# Altium PCB calculator_pcb.PcbDoc
Units mm, origin at the board's own origin, x right, y up, seen from the top; angles counter-clockwise.
Board outline 100 x 150 mm, 2 copper layers (Top Layer, Bottom Layer); 21 components, 9 nets, 157 pads, 24 vias.
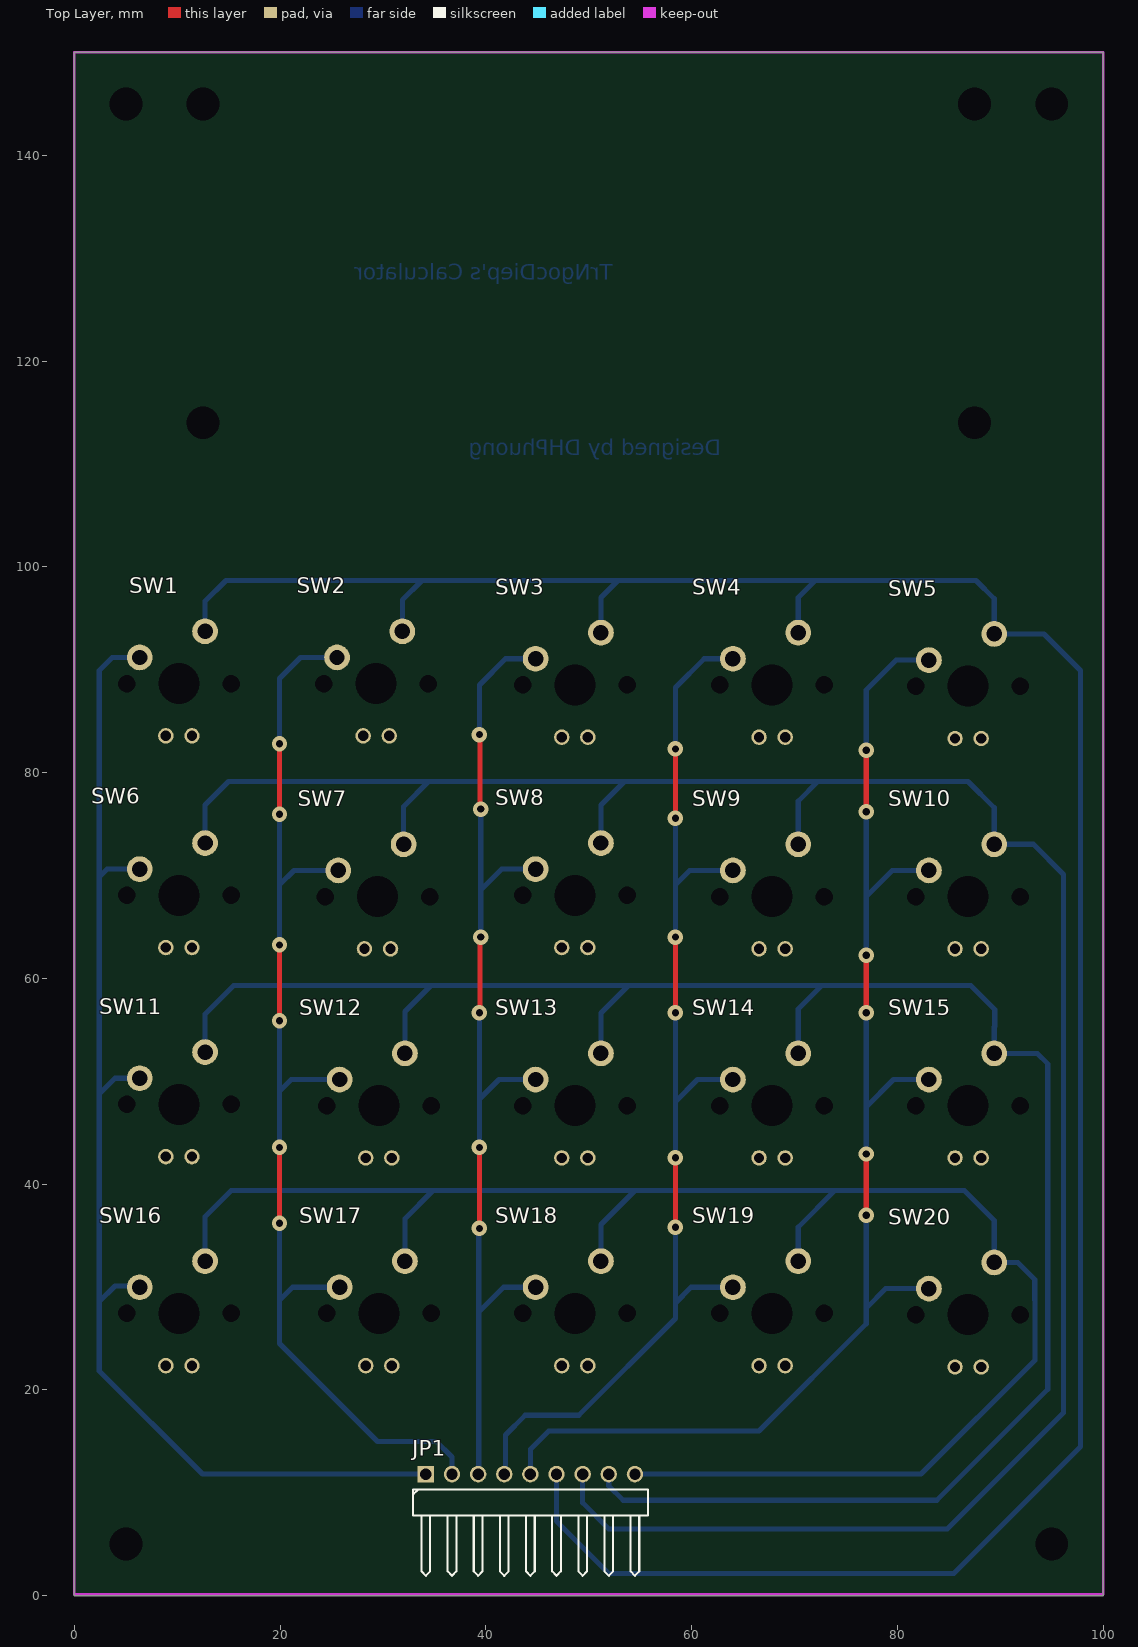
[diagram p0: Top Layer view]
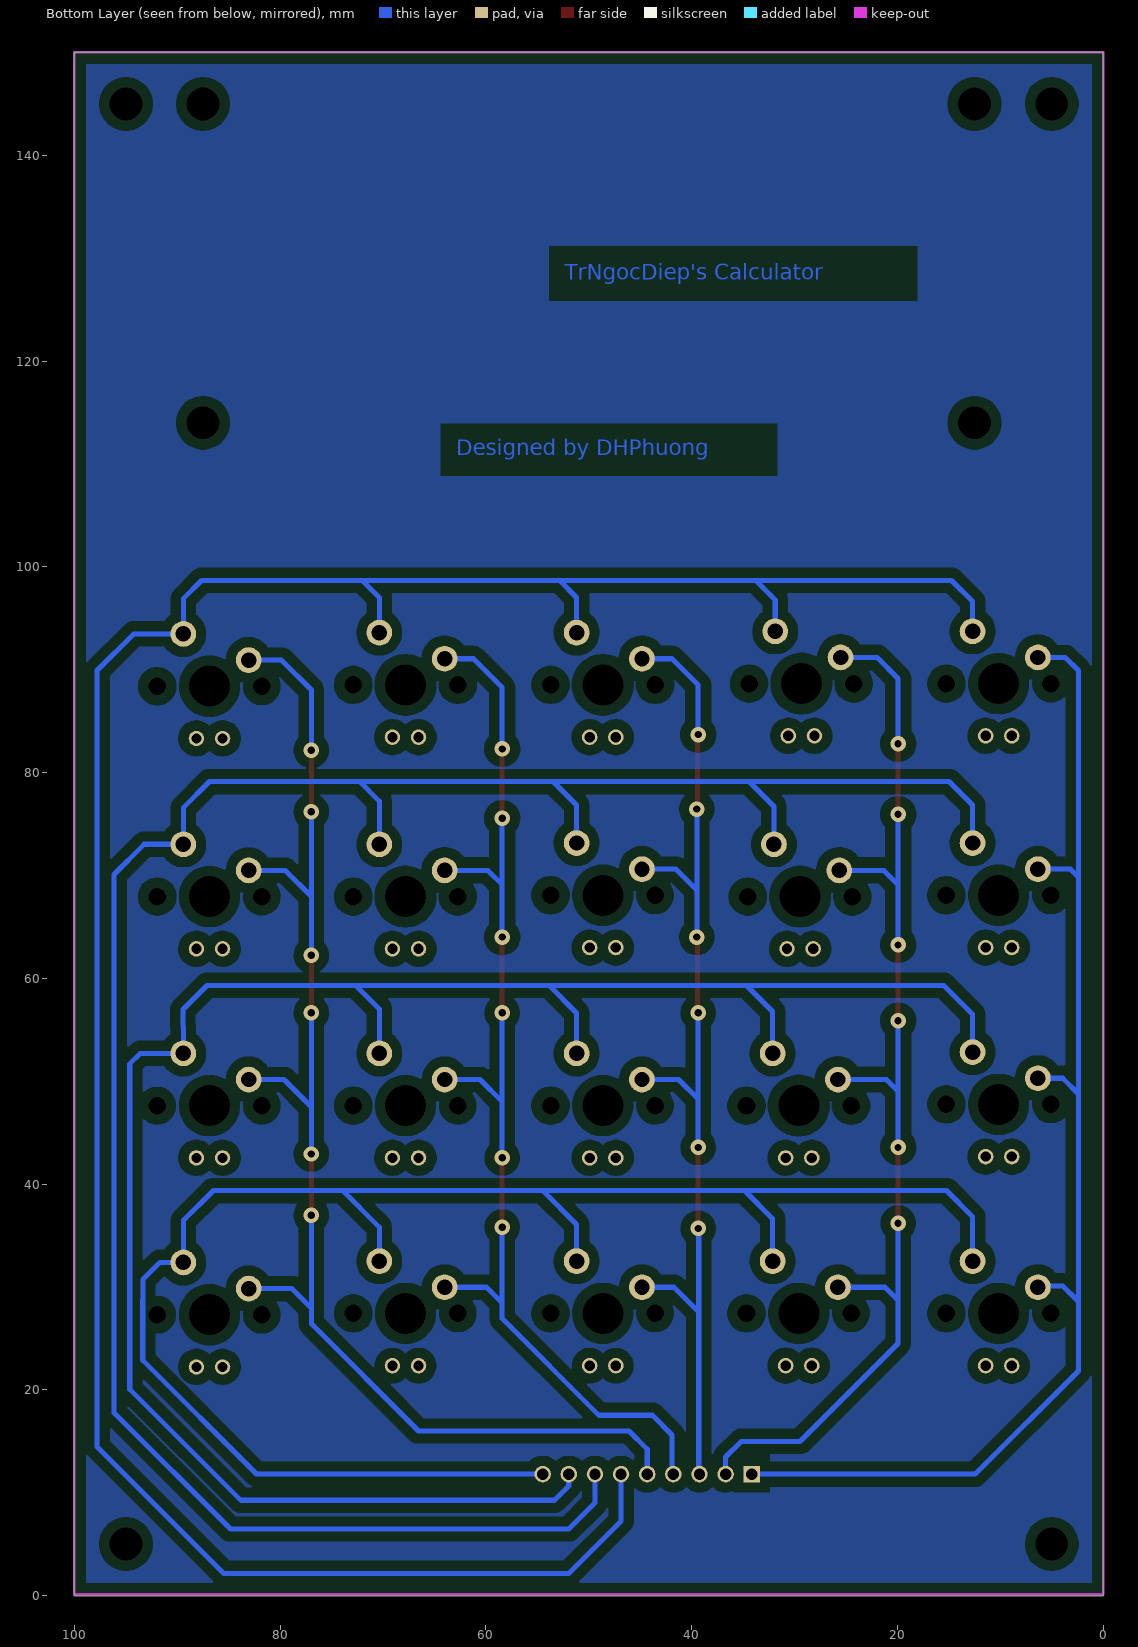
[diagram p1: Bottom Layer view, seen from below]
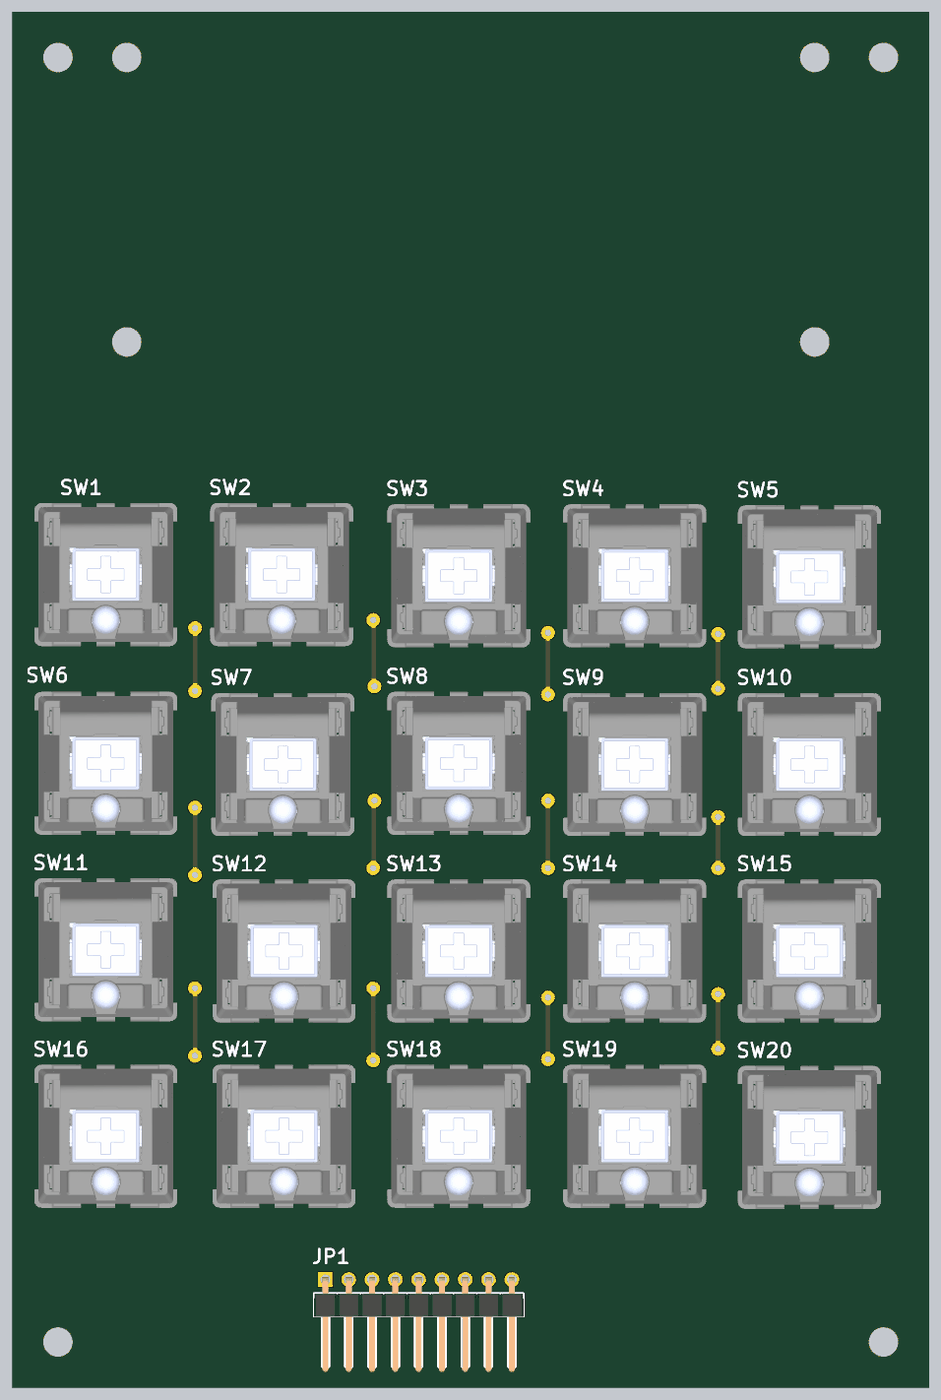
[diagram p2: 3D render of the assembled board from above, using the file's embedded part models]

## Layer stack, top to bottom
Top Solder: solder mask 0.0102, Solder Resist, Dk 3.5
Top Layer: signal copper 0.0356
Dielectric 1: dielectric 0.32, FR-4, Dk 4.8
Bottom Layer: signal copper 0.0356
Bottom Solder: solder mask 0.0102, Solder Resist, Dk 3.5

## Board outline
0,0 0,150 100,150 100,0

## Design rules (kind name [scope] priority, off if disabled: settings)
Clearance [All] p1: gap=1 ignorepadtopadclearanceinfootprint=FALSE
PolygonConnect [All] p1: connectstyle=Relief reliefconductorwidth=0.254 reliefentries=4 polygonreliefangle="90 Angle" airgapwidth=0.254
RoutingVias [All] p1: holewidth=0.711 width=1.27 viastyle="Through Hole" minholewidth=0.711 minwidth=1.27 maxholewidth=0.711 maxwidth=1.27
SolderMaskExpansion [All] p1: expansion=0.102 istentingtop=FALSE
Width [All] p1: maxlimit=0.8 minlimit=0.3 preferedwidth=0.5
30 further rules are at their usual default settings.

## Components (designator, comment, footprint, x,y, rotation, side; value= is the part's Value field where it differs from the comment)
JP1 "JP 1x9 2.54" "JP 1x9 DC" 55.753,9.271 r0 top
SW1 "Cherry MX with an LED" MX_Cherry_LED 10.16,88.646 r0 top
SW2 "Cherry MX with an LED" MX_Cherry_LED 29.337,88.646 r0 top
SW3 "Cherry MX with an LED" MX_Cherry_LED 48.641,88.519 r0 top
SW4 "Cherry MX with an LED" MX_Cherry_LED 67.818,88.519 r0 top
SW5 "Cherry MX with an LED" MX_Cherry_LED 86.868,88.392 r0 top
SW6 "Cherry MX with an LED" MX_Cherry_LED 10.16,68.072 r0 top
SW7 "Cherry MX with an LED" MX_Cherry_LED 29.464,67.945 r0 top
SW8 "Cherry MX with an LED" MX_Cherry_LED 48.641,68.072 r0 top
SW9 "Cherry MX with an LED" MX_Cherry_LED 67.818,67.945 r0 top
SW10 "Cherry MX with an LED" MX_Cherry_LED 86.868,67.945 r0 top
SW11 "Cherry MX with an LED" MX_Cherry_LED 10.16,47.752 r0 top
SW12 "Cherry MX with an LED" MX_Cherry_LED 29.591,47.625 r0 top
SW13 "Cherry MX with an LED" MX_Cherry_LED 48.641,47.625 r0 top
SW14 "Cherry MX with an LED" MX_Cherry_LED 67.818,47.625 r0 top
SW15 "Cherry MX with an LED" MX_Cherry_LED 86.868,47.625 r0 top
SW16 "Cherry MX with an LED" MX_Cherry_LED 10.16,27.432 r0 top
SW17 "Cherry MX with an LED" MX_Cherry_LED 29.591,27.432 r0 top
SW18 "Cherry MX with an LED" MX_Cherry_LED 48.641,27.432 r0 top
SW19 "Cherry MX with an LED" MX_Cherry_LED 67.818,27.432 r0 top
SW20 "Cherry MX with an LED" MX_Cherry_LED 86.868,27.305 r0 top

## Footprints (in the part's own frame and the unit in brackets; to place one, negate y for a bottom-side part, rotate by r counter-clockwise, add the part's x,y. Pads: shape width x height; smd on the part's side, far side on the other; paste and mask are expansions set on the pad)
"JP 1x9 DC" [mm] "9 pins, 1 row, right angled, gold plating"
  rect 1.6x1.6 hole 1.1: 1(-21.59,2.54)
  round 1.6 hole 1.1: 2(-19.05,2.54) 3(-16.51,2.54) 4(-13.97,2.54) 5(-11.43,2.54) 6(-8.89,2.54) 7(-6.35,2.54) 8(-3.81,2.54) 9(-1.27,2.54)
  silkscreen extent -22.86,-7.34 0,1.04, body extent -22.86,-7.52 0,2.84, height 2.55
MX_Cherry_LED [mm] "Cherry Key Pad with LED"
  round 2.5 hole 1.5: 1(2.54,5.08) 2(-3.81,2.54)
  round 1.5 hole 1: 3(-1.27,-5.08) 4(1.27,-5.08)
  round 0 hole 1.702: 6(-5.08,0) 6(5.08,0)
  round 0 hole 3.988: Hole(0,0)
  body extent -7.75,-7.8 7.85,7.8, height 14.9

## Part data
JP1: library part "JP 1x9 2.54 Duc Cong", "Cắm", Chung_Loai=Cắm, Don_Vi=Con, Ma_Hang=MH000904, Ten_Linh_Kien="Jump Đơn Đực 2.54MM 1x40P Cong Đứng"
SW1 SW2 SW3 SW4 SW5 SW6 SW7 SW8 SW9 SW10 SW11 SW12 SW13 SW14 SW15 SW16 SW17 SW18 SW19 SW20: library part MX_Cherry_LED

## Free pads (board coordinates)
  round 1.524 hole 3.2: 2(5,5) 2(12.5,114) 2(12.5,145) 2(87.5,114) 2(87.5,145) 2(95,5) 2(95,145)
  oval 2x1.524 hole 3.2: 2(5,145)

## Via types
v1: diameter 1.5, hole 0.711, Top Layer to Bottom Layer, 24 vias

## Nets (pads, with @x,y where several pads share a name; then routed paths per layer and width w, separated by ;. In a path a pad name is that pad's centre, name@x,y a point inside that pad or via, vN(x,y) a via of type N, cw(c..) or ccw(c..) an arc to the next point about the centre after c; other vN are vias at no path point)
COL1: JP1.1 SW1.2 SW6.2 SW11.2 SW16.2 | length 121.9
  Bottom Layer w0.5: SW16.2 6.223,30.099 3.937,30.099 2.413,28.575 ; SW11.2 3.937,50.292 2.413,48.768 ; SW6.2 3.175,70.612 2.413,69.85 ; SW1.2 3.683,91.186 2.413,89.916 2.413,69.85 ; JP1.1 12.446,11.811 2.413,21.844 2.413,28.575 ; 2.413,28.575 2.413,48.768 ; 2.413,48.768 2.413,69.85
COL2: JP1.2 SW2.2 SW7.2 SW12.2 SW17.2 | length 113
  Top Layer w0.5: v1(19.939,36.195) v1(19.939,43.561) ; v1(19.939,55.88) v1(19.939,63.246) ; v1(19.939,75.946) v1(19.939,82.804)
  Bottom Layer w0.5: v1(19.939,36.195) 19.939,28.702 ; v1(19.939,43.561) 19.939,49.022 ; v1(19.939,55.88) 19.939,49.022 ; v1(19.939,63.246) 19.939,69.088 ; v1(19.939,75.946) 19.939,69.088 ; v1(19.939,82.804) 19.939,89.154 21.971,91.186 SW2.2 ; SW7.2 21.336,70.485 19.939,69.088 ; SW17.2 21.209,29.972 19.939,28.702 ; SW12.2 21.082,50.165 19.939,49.022 ; JP1.2 36.703,13.462 35.179,14.986 29.464,14.986 19.939,24.511 19.939,28.702
COL3: JP1.3 SW3.2 SW8.2 SW13.2 SW18.2 | length 102.3
  Top Layer w0.5: v1(39.37,35.687) v1(39.37,43.561) ; v1(39.37,56.642) 39.433,56.706 39.433,63.944 v1(39.497,64.008) ; v1(39.37,83.693) 39.433,83.629 39.433,76.517 v1(39.497,76.454)
  Bottom Layer w0.5: JP1.3 39.306,11.874 39.306,27.559 ; v1(39.37,35.687) 39.306,35.623 39.306,27.559 ; v1(39.37,43.561) 39.37,48.26 ; v1(39.37,56.642) 39.37,48.26 ; v1(39.37,83.693) 39.37,88.519 41.91,91.059 SW3.2 ; v1(39.497,64.008) 39.497,68.58 ; v1(39.497,76.454) 39.497,68.58 ; SW18.2 41.719,29.972 39.306,27.559 ; SW13.2 41.275,50.165 39.37,48.26 ; SW8.2 41.529,70.612 39.497,68.58
COL4: JP1.4 SW4.2 SW9.2 SW14.2 SW19.2 | length 112
  Top Layer w0.5: v1(58.42,35.814) v1(58.42,42.545) ; v1(58.42,56.642) v1(58.42,64.008) ; v1(58.42,75.565) v1(58.42,82.296)
  Bottom Layer w0.5: JP1.4 41.91,11.938 41.91,15.621 43.815,17.526 49.022,17.526 58.42,26.924 58.42,28.448 ; v1(58.42,35.814) 58.42,28.448 ; v1(58.42,42.545) 58.42,48.006 ; v1(58.42,56.642) 58.42,48.006 ; v1(58.42,64.008) 58.42,69.088 ; v1(58.42,75.565) 58.42,69.088 ; v1(58.42,82.296) 58.42,88.265 61.214,91.059 SW4.2 ; SW19.2 59.944,29.972 58.42,28.448 ; SW14.2 60.579,50.165 58.42,48.006 ; SW9.2 59.817,70.485 58.42,69.088
COL5: JP1.5 SW5.2 SW10.2 SW15.2 SW20.2 | length 130.2
  Top Layer w0.5: v1(76.962,36.957) v1(76.962,42.926) ; v1(76.962,56.642) v1(76.962,62.23) ; v1(76.962,76.2) v1(76.962,82.169)
  Bottom Layer w0.5: JP1.5 44.323,14.224 46.101,16.002 66.548,16.002 76.962,26.416 76.962,27.94 ; v1(76.962,36.957) 76.962,27.94 ; v1(76.962,42.926) 76.962,47.498 ; v1(76.962,56.642) 76.962,47.498 ; v1(76.962,62.23) 76.962,67.945 ; v1(76.962,76.2) 76.962,67.945 ; v1(76.962,82.169) 76.962,88.011 79.883,90.932 SW5.2 ; SW20.2 78.867,29.845 76.962,27.94 ; SW15.2 79.629,50.165 76.962,47.498 ; SW10.2 79.502,70.485 76.962,67.945
ROW1: JP1.6 SW1.1 SW2.1 SW3.1 SW4.1 SW5.1 | length 249.9
  Bottom Layer w0.5: SW1.1 12.7,96.647 14.732,98.679 33.782,98.679 ; SW2.1 31.877,96.774 33.782,98.679 ; JP1.6 46.863,7.239 51.943,2.159 85.471,2.159 97.79,14.478 97.79,89.916 94.234,93.472 SW5.1 89.408,96.901 87.63,98.679 72.009,98.679 ; SW3.1 51.181,97.028 52.832,98.679 ; SW4.1 70.358,97.028 72.009,98.679 ; 33.782,98.679 52.832,98.679 ; 52.832,98.679 72.009,98.679
ROW2: JP1.7 SW6.1 SW7.1 SW8.1 SW9.1 SW10.1 | length 222.4
  Bottom Layer w0.5: SW6.1 12.7,76.835 14.986,79.121 34.417,79.121 ; SW7.1 32.004,76.708 34.417,79.121 ; JP1.7 49.403,9.017 51.943,6.477 84.836,6.477 96.139,17.78 96.139,70.104 93.218,73.025 SW10.1 89.408,76.581 86.868,79.121 72.263,79.121 ; SW8.1 51.181,76.835 53.467,79.121 ; SW9.1 70.358,77.216 72.263,79.121 ; 34.417,79.121 53.467,79.121 ; 53.467,79.121 72.263,79.121
ROW3: JP1.8 SW11.1 SW12.1 SW13.1 SW14.1 SW15.1 | length 195.9
  Bottom Layer w0.5: SW11.1 12.7,56.515 15.494,59.309 34.671,59.309 ; SW12.1 32.131,56.769 34.671,59.309 ; SW13.1 51.181,56.642 53.848,59.309 ; JP1.8 51.943,10.668 53.34,9.271 83.82,9.271 94.615,20.066 94.615,51.689 93.599,52.705 SW15.1 89.408,55.279 89.455,55.326 89.455,56.976 87.122,59.309 72.644,59.309 ; SW14.1 70.358,57.023 72.644,59.309 ; 34.671,59.309 53.848,59.309 ; 53.848,59.309 72.644,59.309
ROW4: JP1.9 SW16.1 SW17.1 SW18.1 SW19.1 SW20.1 | length 167.8
  Bottom Layer w0.5: SW16.1 12.7,36.83 15.24,39.37 34.861,39.37 ; SW17.1 32.131,36.639 34.861,39.37 ; SW18.1 51.181,36.068 54.483,39.37 ; JP1.9 82.296,11.811 93.359,22.874 93.359,28.72 93.345,28.734 93.345,30.734 91.694,32.385 SW20.1 89.408,36.449 86.487,39.37 73.914,39.37 ; SW19.1 70.358,35.814 73.914,39.37 ; 34.861,39.37 54.483,39.37 ; 54.483,39.37 73.914,39.37
pads on no net: SW1.3 SW1.4 SW1.6 SW1.Hole SW2.3 SW2.4 SW2.6 SW2.Hole SW3.3 SW3.4 SW3.6 SW3.Hole SW4.3 SW4.4 SW4.6 SW4.Hole SW5.3 SW5.4 SW5.6 SW5.Hole SW6.3 SW6.4 SW6.6 SW6.Hole SW7.3 SW7.4 SW7.6 SW7.Hole SW8.3 SW8.4 SW8.6 SW8.Hole SW9.3 SW9.4 SW9.6 SW9.Hole SW10.3 SW10.4 SW10.6 SW10.Hole SW11.3 SW11.4 SW11.6 SW11.Hole SW12.3 SW12.4 SW12.6 SW12.Hole SW13.3 SW13.4 SW13.6 SW13.Hole SW14.3 SW14.4 SW14.6 SW14.Hole SW15.3 SW15.4 SW15.6 SW15.Hole SW16.3 SW16.4 SW16.6 SW16.Hole SW17.3 SW17.4 SW17.6 SW17.Hole SW18.3 SW18.4 SW18.6 SW18.Hole SW19.3 SW19.4 SW19.6 SW19.Hole SW20.3 SW20.4 SW20.6 SW20.Hole

## Polygon pours and split planes (outlines as drawn)
no net on Bottom Layer "NONET_L02_P000" (solid, pour order 0): 0,149.987 99.949,149.987 99.949,0 99.822,0.127 0,0.127

## Keep-outs
Keep-Out Layer:
  lines w0.254: 0,0.127 0,150 100,150 100,0.127 0,0.127

## Other copper
Bottom Layer:
  text "TrNgocDiep's Calculator" at 52.332,127.881 h1.52
  text "Designed by DHPhuong" at 62.873,110.863 h1.52